# EAGLE board Regulator (EAGLE 8.0.0)
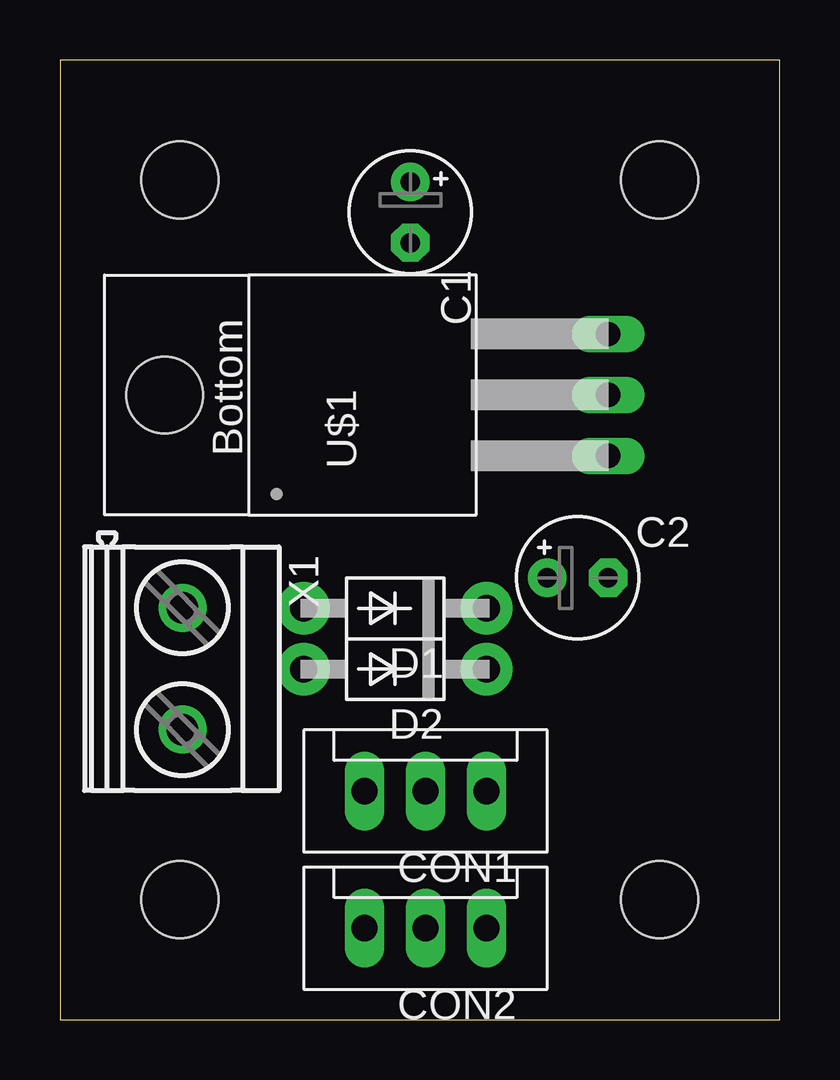
[diagram p0: board, top side]
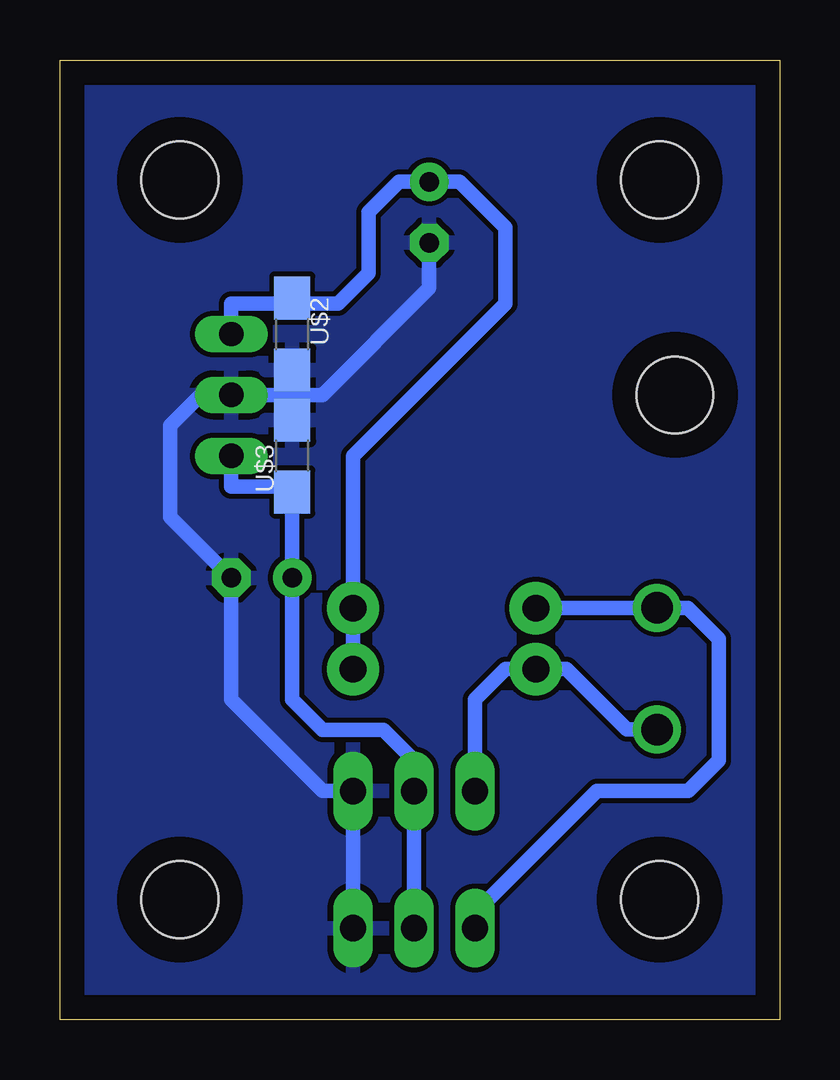
[diagram p1: board, bottom side, seen from below]

Size 30 x 40 mm. Coordinates in mm from the lower left corner, seen from the top.
Outline: 0,0 30,0 30,40 0,40 0,0
Copper layers (1*16): Top 0.035mm / dielectric 1.5mm / Bottom 0.035mm
Design rules "default": minimum track width 10mil, minimum drill 24mil, track to track 8mil, track to pad 8mil, pad to pad 8mil, via to via 8mil, smd to smd 8mil, copper to edge 40mil, drill to drill 8mil, minimum pad ring 10mil, minimum via ring 8mil, stop-mask expansion 4mil, vias tented up to drill 0mil, thermal gap 10mil
Holes 3.2 mm at 5,5 25,5 25,35 5,35

## Footprints (pad centres in the part's own frame; a part is rotated, then mirrored left to right if it is on the bottom)
D=1,φ=5 = drill 0.813 pad 1.6: + -1.27,0 | drill 0.813 pad 1.6 octagon: - 1.27,0
CON3 = drill 1.1 long: P$1 2.54,0; P$2 0,0; P$3 -2.54,0
DO41(D=3) = drill 1.118 pad 2.184: A 3.81,0; C -3.81,0
TO-220(LIE) = drill 1.016 long: 1 2.54,0; 2 0,0; 3 -2.54,0 | hole 3.2: 0,18.5
0805 = smd 1.8 x 1.5: 1 -1.5,0; 2 1.5,0
MKDSN1,5/2-5,08 = drill 1.3 pad 2: 1 -2.561,0.025; 2 2.519,0.025

## Placement (x,y rotation side)
C1  100u  [D=1,φ=5]  14.61,33.66 270 top
C2  100u  [D=1,φ=5]  21.59,18.41 0 top
CON1  CON3  [CON3]  15.24,9.53 180 top
CON2  CON3  [CON3]  15.24,3.81 180 top
D1  (汎用)D=3  [DO41(D=3)]  13.97,17.14 180 top
D2  (汎用)D=3  [DO41(D=3)]  13.97,14.61 180 top
U$1  TO-220-LIE(VREG)  [TO-220(LIE)]  22.86,26.04 90 top
U$2  0.1u  [0805]  20.32,28.57 270 bottom
U$3  0.1u  [0805]  20.32,23.5 90 bottom
X1  MKDSN1,5/2-5,08  [MKDSN1,5/2-5,08]  5.08,14.61 270 top

## Library data of the parts
C1 C2 = (Foundation)電解コンデンサ
CON1 CON2 = (コネクタ)XH
D1 D2 = (半導体)ダイオード
U$1 = (半導体)FET＆トランジスタ
U$2 U$3 = (Foundation)表面実装RC
X1 = con-phoenix-508

## Nets
+5V: C2.+ CON1.P$2 CON2.P$2 U$1.3 U$3.1
GND: C1.- C2.- CON1.P$3 CON2.P$3 U$1.2 U$2.2 U$3.2
N$1: CON2.P$1 D1.A X1.1
N$2: CON1.P$1 D2.A X1.2
N$4: C1.+ D1.C D2.C U$1.1 U$2.1

## Tracks (layer width: path | path; a pad name or v marks a point on that pad's centre or on a via)
+5V
  Bottom 0.61: CON2.P$2 CON1.P$2 15.24,10.79 16.51,12.06 19.05,12.06 20.32,13.34 C2.+ U$3.1 20.55,22.23 22.86,22.23 U$1.3
GND
  Bottom 0.61: CON2.P$3 CON1.P$3 19.05,9.53 22.86,13.34 C2.- 25.4,20.95 25.4,24.77 24.13,26.04 U$1.2 20.32,26.04 | 20.32,26.04 U$2.2 | 20.32,26.04 U$3.2 | C1.- 14.61,30.48 19.05,26.04 20.32,26.04
  pour Bottom: 0,0 0,40 30,40 30,0
N$1
  Bottom 0.61: D1.A 10.14,17.17 X1.1 3.83,17.17 2.54,15.88 2.54,10.79 3.81,9.53 7.62,9.53 12.7,4.45 CON2.P$1
N$2
  Bottom 0.61: CON1.P$1 12.7,13.34 11.43,14.61 D2.A 8.89,14.61 6.37,12.09 X1.2
N$4
  Bottom 0.61: D2.C D1.C 17.78,23.5 11.43,29.84 11.43,33.02 13.34,34.92 C1.+ 15.88,34.92 17.14,33.66 17.14,31.11 18.41,29.84 20.09,29.84 U$2.1 20.55,29.84 22.86,29.84 U$1.1